# Altium PCB PCB3.PcbDoc (part 1 of 2)
Units mil, origin at the board's own origin, x right, y up, seen from the top; angles counter-clockwise.
Board outline 2200 x 2730 mil, 2 copper layers (Top Layer, Bottom Layer); 68 components, 62 nets, 257 pads, 89 vias.
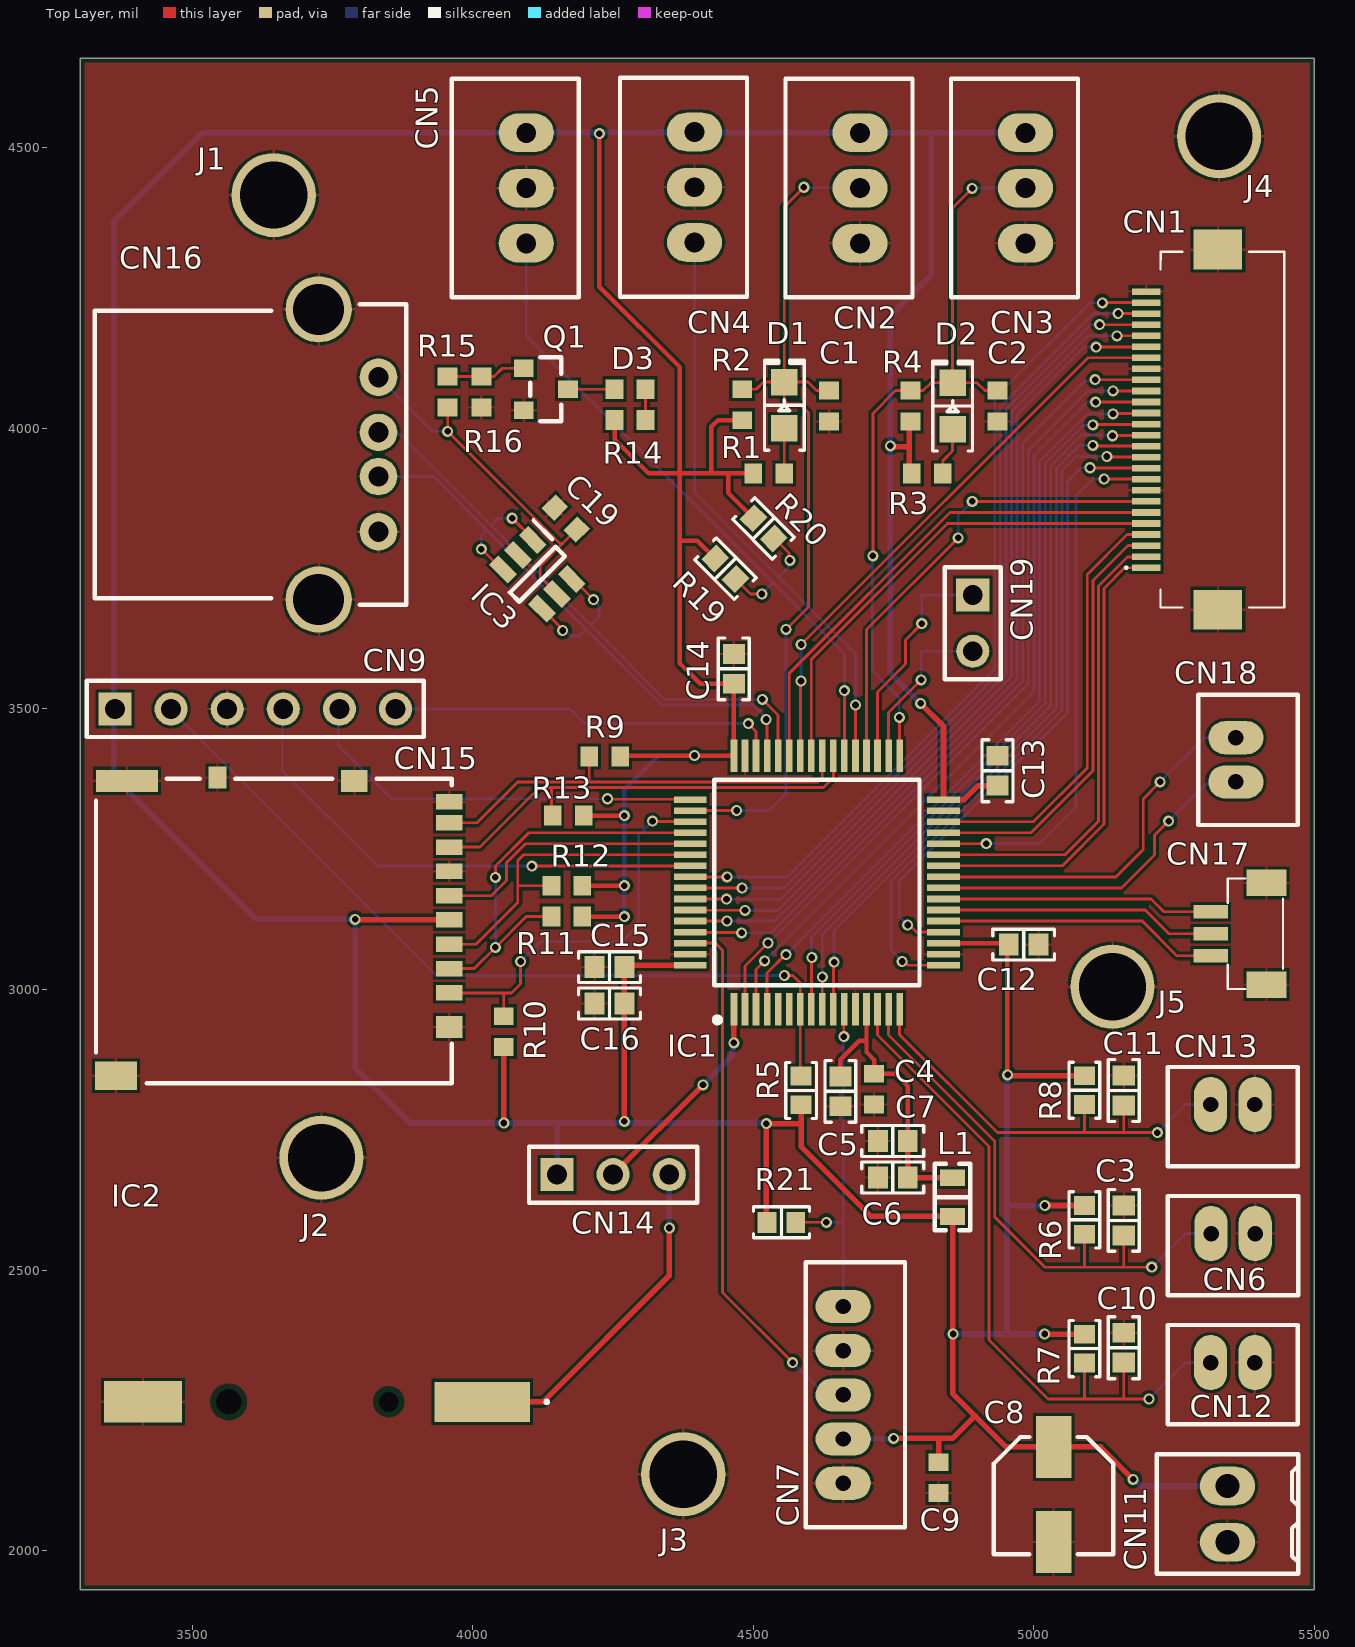
[diagram p0: Top Layer view]
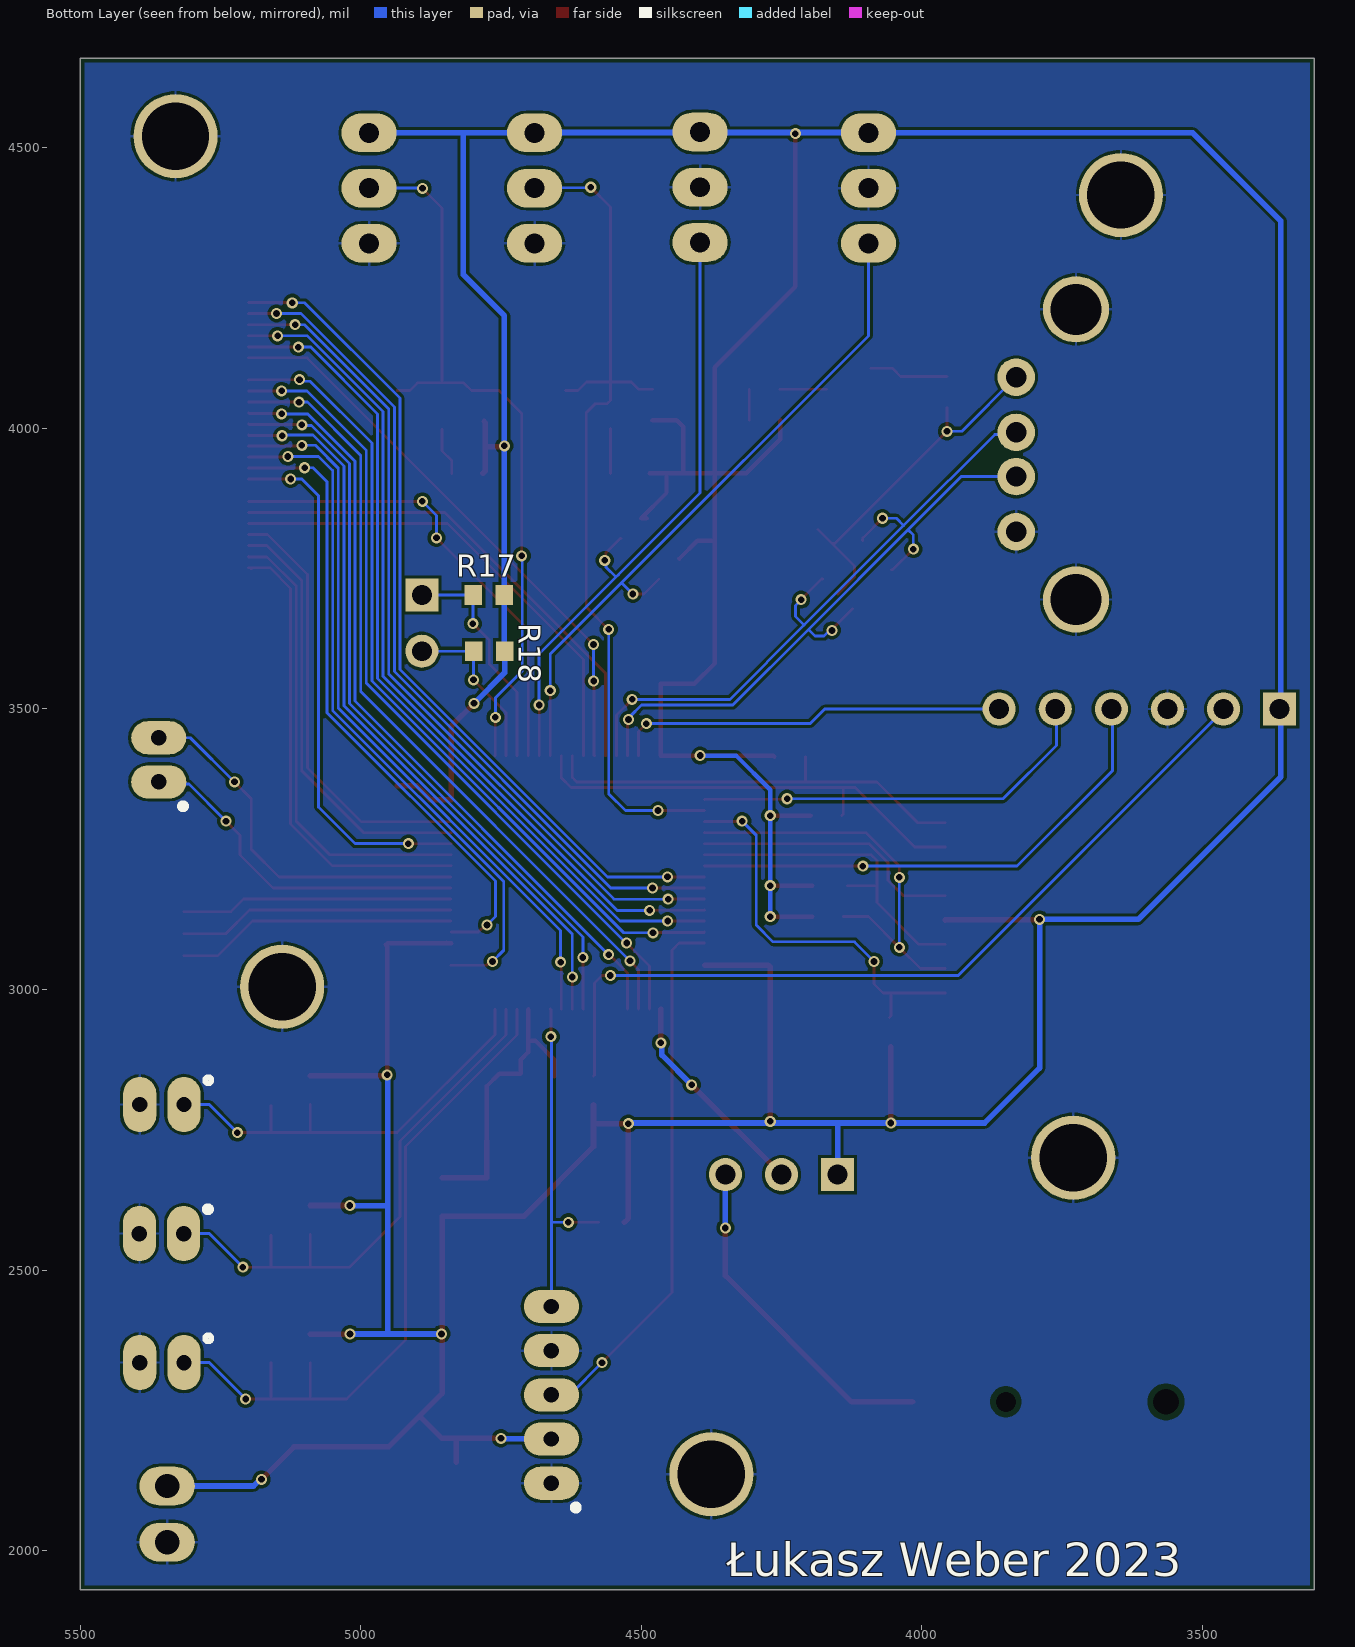
[diagram p1: Bottom Layer view, seen from below]
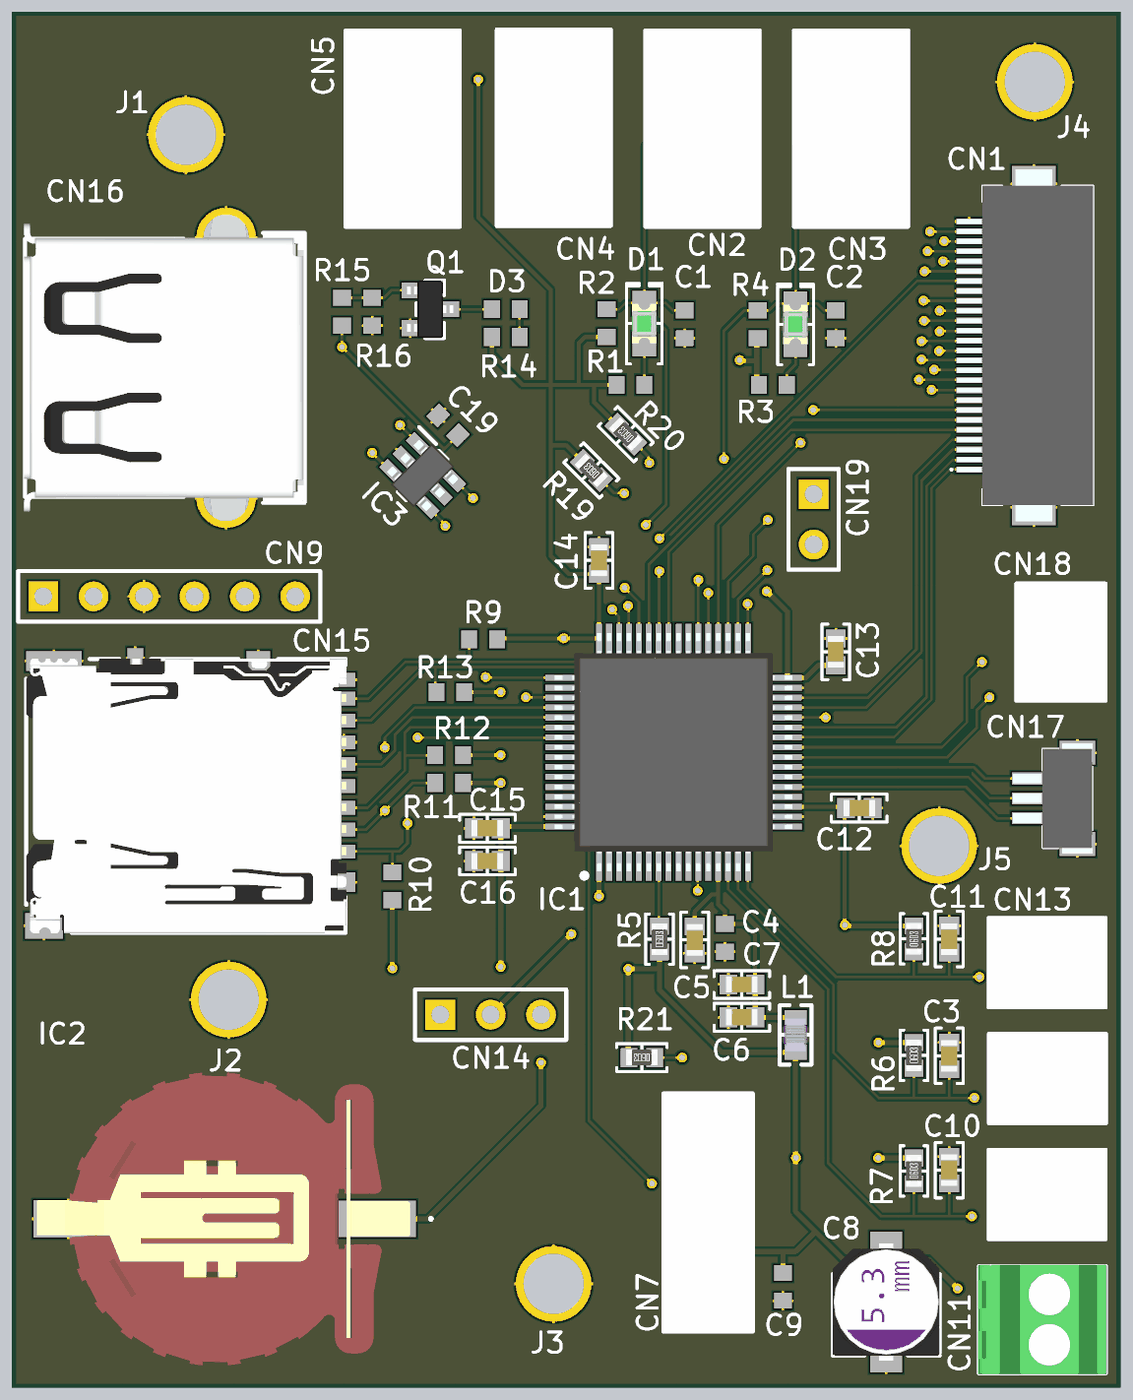
[diagram p2: 3D render of the assembled board from above, using the file's embedded part models]

## Layer stack, top to bottom
Top Solder: solder mask 0.4, Solder Resist, Dk 3.5
Top Layer: signal copper 1.4
Dielectric 1: dielectric 12.6, FR-4, Dk 4.8
Bottom Layer: signal copper 1.4
Bottom Solder: solder mask 0.4, Solder Resist, Dk 3.5

## Board outline
3300,1930 3300,4660 5500,4660 5500,1930

## Design rules (kind name [scope] priority, off if disabled: settings)
BoardOutlineClearance [All] p1: gap=7.87 ignorepadtopadclearanceinfootprint=FALSE
Clearance [All] p1: gap=5 ignorepadtopadclearanceinfootprint=FALSE except(9.84: Arc-Hole Track-Hole SMDPad-Hole THPad-Hole Via-Hole Fill-Hole Poly-Hole Region-Hole Text-Hole)
ComponentClearance [All] p1: gap=5 collisioncheckmode=3 verticalgap=5 showdistances=TRUE
DiffPairsRouting [All] p1: maxlimit=10 minlimit=5 mostfreqgap=5 toplayer_minwidth=5 toplayer_maxwidth=1000 toplayer_prefwidth=5 bottomlayer_minwidth=5 bottomlayer_maxwidth=1000 bottomlayer_prefwidth=5 maxuncoupledlength=500
Height [All] p1: minheight=0 maxheight=71497.94 prefheight=500
HoleSize [All] p1: absolutevalues=TRUE maxlimit=248.03 minlimit=5.91 maxpercent=80.000 minpercent=20.000
HoleToHoleClearance [All] p1: gap=19.68 allowstackedmicrovias=FALSE
MinimumAnnularRing [All] p1: minimumring=3
MinimumSolderMaskSliver [All] p1: minsoldermaskwidth=0
PlaneClearance [All] p1: clearance=5
PlaneConnect PlaneConnectPowerPads [InPadClass('PowerPads')] p1: planeconnectstyle=Direct reliefexpansion=20 reliefentries=4 reliefconductorwidth=10 reliefairgap=10
PlaneConnect [All] p2: pad.planeconnectstyle=Relief pad.reliefexpansion=11.81 pad.reliefentries=4 pad.reliefconductorwidth=5 pad.reliefairgap=5 via.planeconnectstyle=Direct via.reliefexpansion=11.81 via.reliefentries=4 via.reliefconductorwidth=5 via.reliefairgap=5
PolygonConnect PolygonConnectPowerPads [All vs (InPadClass('PowerPads'))] p1: connectstyle=Direct reliefconductorwidth=10 reliefentries=4 polygonreliefangle="90 Angle" airgapwidth=10
PolygonConnect [All] p2: thpad.connectstyle=Relief thpad.reliefconductorwidth=5 thpad.reliefentries=4 thpad.polygonreliefangle="90 Angle" thpad.airgapwidth=5 smdpad.connectstyle=Relief smdpad.reliefconductorwidth=5 smdpad.reliefentries=4 smdpad.polygonreliefangle="90 Angle" smdpad.airgapwidth=5 via.connectstyle=Direct via.reliefconductorwidth=5 via.reliefentries=4 via.polygonreliefangle="90 Angle" via.airgapwidth=5
RoutingVias [All] p1: holewidth=11.81 width=19.68 viastyle="Through Hole" minholewidth=11.81 minwidth=19.68 maxholewidth=11.81 maxwidth=19.68
SilkToSilkClearance [All] p1: silktosilkclearance=0
SilkToSolderMaskClearance [IsPad] p1: minsilkscreentomaskgap=5 clearancetoexposedcopper=TRUE
SolderMaskExpansion [All] p1: expansion=2.95 istentingtop=FALSE
Width [All] p1: maxlimit=1000 minlimit=5 preferedwidth=5 minimp=50.000000 maximp=50.000000 favimp=50.000000
20 further rules are at their usual default settings.

## Classes and differential pairs
differential pair USB: +USB_P -USB_N

## Components (designator, comment, footprint, x,y, rotation, side; value= is the part's Value field where it differs from the comment)
C1 "X5R" 1608[0603] 4635,4040 r270 top value=100nF
C2 "X5R" 1608[0603] 4935,4040 r270 top value=100nF
C3 "10uF" "CAP 0603_1608" 5160,2588.43 r270 top value=1µF
C4 "X7R" 1608[0603] 4715,2822.44 r90 top value=10nF
C5 "0.1 µF" "CAP 0603_1608" 4655,2818.43 r90 top
C6 "1µF" "CAP 0603_1608" 4748.43,2665 r0 top
C7 "1µF" "CAP 0603_1608" 4748.43,2730 r0 top
C8 "100µF" "CAP ALSMD POLY 5.3MM H6.0MM" 5035,2100 r270 top
C9 "X5R" 1608[0603] 4830,2130 r270 top value=100nF
C10 "10uF" "CAP 0603_1608" 5160,2361.57 r270 top value=1µF
C11 "4.7uF" "CAP 0603_1608" 5160,2820 r270 top value=1µF
C12 "0.1 µF" "CAP 0603_1608" 4981.57,3080 r180 top
C13 "0.1 µF" "CAP 0603_1608" 4935,3390 r270 top
C14 "0.1 µF" "CAP 0603_1608" 4465,3571.57 r270 top
C15 "0.1 µF" "CAP 0603_1608" 4243.43,3040 r0 top
C16 "4.7 µF" "CAP 0603_1608" 4243.43,2975 r0 top
C19 "Cap" 1608[0603] 4165.51,3839.49 r315 top value=100nF
CN1 "FH12-26S-0.5SH_55_" FH1226S05SH55 5304.33,3997.95 r90 top
CN2 "B3B-XH-A(LF)(SN)" "JST XH B3B-XH-A" 4690,4428.43 r270 top
CN3 "B3B-XH-A(LF)(SN)" "JST XH B3B-XH-A" 4985,4428.43 r270 top
CN4 "B3B-XH-A(LF)(SN)" "JST XH B3B-XH-A" 4395,4430 r270 top
CN5 "B3B-XH-A(LF)(SN)" "JST XH B3B-XH-A" 4095,4428.43 r270 top
CN6 "B2B-PH-K-S(LF)(SN)" "JST B2B-PH-K" 5355,2565 r0 top
CN7 "B5B-PH-K-S(LF)(SN)" "JST B5B-PH-K" 4660,2277.52 r90 top
CN9 "Header 6" HDR1X6 3362,3500 r0 top
CN11 "282834-2" "TE 282834-2" 5345,2065 r270 top
CN12 "B2B-PH-K-S(LF)(SN)" "JST B2B-PH-K" 5354.37,2335 r0 top
CN13 "B2B-PH-K-S(LF)(SN)" "JST B2B-PH-K" 5354.37,2795 r0 top
CN14 "Header 3" HDR1X3 4150,2670 r0 top
CN15 "DM3AT-SF-PEJM5" "HIROSE DM3AT-SF-PEJM5" 3650,3120 r270 top
CN16 "USB-A1HSW6" "ON SHORE TECHNOLOGY USB-A1HSW6" 3601.38,3953.66 r270 top
CN17 "BM03B-SRSS-TBT_LF__SN_" BM03BSRSSTBTLFSN 5345.51,3099.37 r90 top
CN18 "B2B-PH-K-S(LF)(SN)" "JST B2B-PH-K" 5360,3409.37 r90 top
CN19 "Header 2" HDR1X2 4891,3703 r270 top
D1 "Green" "LED 0805_2012 GREEN" 4555,4041.34 r90 top
D2 "Green" "LED 0805_2012 GREEN" 4855,4040 r90 top
D3 "Green" 1608[0603] 4280,4070 r180 top
IC1 "STM32L562RET6" QFP50P1200X1200X160-64N 4612.95,3190.91 r90 top locked
IC2 "CR1220-H-SMD" CR1220HSMD 3712.2,2265 r180 top
IC3 "USBLC6-2SC6" SOT95P280X145-6N 4115,3740 r315 top
J1 "PTH 3.2mm" "PTH 3.2mm" 3645,4415 r0 top
J2 "PTH 3.2mm" "PTH 3.2mm" 3730,2699 r0 top
J3 "PTH 3.2mm" "PTH 3.2mm" 4375,2135 r0 top
J4 "PTH 3.2mm" "PTH 3.2mm" 5330,4520 r0 top
J5 "PTH 3.2mm" "PTH 3.2mm" 5140,3004 r0 top
L1 "FCM1608KF-601T03" "IND 0603_1608 RF WW" 4855,2630 r270 top value=27nH
Q1 "MMBT3904-TP" "MCCSEMI SOT-23-3" 4130,4070 r0 top
R1 "Res1" 1608[0603] 4527.44,3920 r0 top value=220R
R2 "Res1" 1608[0603] 4480,4042.44 r90 top value=10k
R3 "Res1" 1608[0603] 4810,3920 r0 top value=220R
R4 "Res1" 1608[0603] 4780,4040 r90 top value=10k
R5 "10k" "RES 0603_1608" 4585,2820 r90 top
R6 "4.7 kOhms" "RES 0603_1608" 5090,2589.41 r90 top
R7 "4.7 kOhms" "RES 0603_1608" 5090,2360 r90 top
R8 "2.2 kOhms" "RES 0603_1608" 5090,2820.59 r90 top
R9 "Res1" 1608[0603] 4235,3415 r180 top value=47k
R10 "Res1" 1608[0603] 4055,2925 r270 top value=47k
R11 "Res1" 1608[0603] 4167.56,3130 r0 top value=47k
R12 "Res1" 1608[0603] 4167.56,3185 r180 top value=47k
R13 "Res1" 1608[0603] 4170,3310 r0 top value=47k
R14 "Res1" 1608[0603] 4280,4015 r180 top value=330
R15 "Res1" 1608[0603] 3955,4065 r270 top value=47k
R16 "Res1" 1608[0603] 4015,4065 r90 top value=22k
R17 "Res1" 1608[0603] 4771.56,3703 r0 bottom value=4k7
R18 "Res1" 1608[0603] 4771,3603 r0 bottom value=4k7
R19 "10k" "RES 0603_1608" 4450,3750 r135 top
R20 "10k" "RES 0603_1608" 4518.1,3821.9 r135 top
R21 "4.7 kOhms" "RES 0603_1608" 4550,2585 r180 top

## Footprints (in the part's own frame and the unit in brackets; to place one, negate y for a bottom-side part, rotate by r counter-clockwise, add the part's x,y. Pads: shape width x height; smd on the part's side, far side on the other; paste and mask are expansions set on the pad)
1608[0603] [mm] "Chip Capacitor, Body 1.6x0.8mm, IPC High Density"
  rect 0.8x0.9 smd: 1(-0.7,0) 2(0.7,0)
  body extent -0.87,-0.48 0.87,0.48, height 1.3
BM03BSRSSTBTLFSN [mm]
  rect 0.6x1.55 smd: 1(-1,0.775) 2(0,0.775) 3(1,0.775)
  rect 1.2x1.8 smd: MP1(-2.3,-1.75) MP2(2.3,-1.75)
  silkscreen extent -2.5,-2.5 2.5,0, body extent -2.78,-2.53 2.78,1.49, height 4.35
"CAP 0603_1608" [mm] "Chip Capacitor, 2-Leads, Body 1.60x0.80mm, IPC Medium Density"
  rect 0.9x1 smd: 1(-0.675,0) 2(0.675,0)
  silkscreen extent -1.4,-0.7 1.4,0.7, body extent -0.8,-0.41 0.8,0.41, height 0.82
"CAP ALSMD POLY 5.3MM H6.0MM" [mm] "Aluminum Polymer Capacitor, Body 5.30x5.30x6.0mm, IPC Medium Density"
  rect 2.8x1.6 smd: 1(-2.15,0) 2(2.15,0)
  silkscreen extent -2.6,-2.7 2.7,2.7, body extent -2.95,-2.7 2.95,2.7, height 6
CR1220HSMD [mm]
  rect 4.32x1.82 smd: 1(-7.73,0)
  rect 3.52x1.87 smd: 2(7.63,0)
  round 0.45 hole 0.9 unplated: MH1(-3.5,0)
  round 0.58 hole 1.16 unplated: MH2(3.75,0)
  silkscreen extent -10.7,-0.05 -10.6,0.05, body extent -9.6,-7.37 9.2,7.38, height 4.21
FH1226S05SH55 [mm]
  rect 0.3x1.3 smd: 1(-6.25,2.65) 2(-5.75,2.65) 3(-5.25,2.65) 4(-4.75,2.65) 5(-4.25,2.65) 6(-3.75,2.65) 7(-3.25,2.65) 8(-2.75,2.65) 9(-2.25,2.65) 10(-1.75,2.65) 11(-1.25,2.65) 12(-0.75,2.65) 13(-0.25,2.65) 14(0.25,2.65) 15(0.75,2.65) 16(1.25,2.65) 17(1.75,2.65) 18(2.25,2.65) 19(2.75,2.65) 20(3.25,2.65) 21(3.75,2.65) 22(4.25,2.65) 23(4.75,2.65) 24(5.25,2.65) 25(5.75,2.65) 26(6.25,2.65)
  rect 1.8x2.2 smd: MP1(-8.15,-0.6) MP2(8.15,-0.6)
  silkscreen extent -8.05,-3.6 8.05,3.6, body extent -8.87,-3.6 8.87,3.27, height 2.3
HDR1X2 [mm] "Connector; Header; 2 Position"
  rect 1.5x1.5 hole 0.9: 1(0,0)
  round 1.5 hole 0.9: 2(2.54,0)
  silkscreen extent -1.27,-1.27 3.81,1.27
HDR1X3 [mm] "Connector; Header; 3 Position"
  rect 1.5x1.5 hole 0.9: 1(0,0)
  round 1.5 hole 0.9: 2(2.54,0) 3(5.08,0)
  silkscreen extent -1.27,-1.27 6.35,1.27
HDR1X6 [mm] "Connector; Header; 6 Position"
  rect 1.5x1.5 hole 0.9: 1(0,0)
  round 1.5 hole 0.9: 2(2.54,0) 3(5.08,0) 4(7.62,0) 5(10.16,0) 6(12.7,0)
  silkscreen extent -1.27,-1.27 13.97,1.27
"HIROSE DM3AT-SF-PEJM5" [mm]
  rect 0.7x1.2 smd: 1(3.2,7.825) 2(2.1,7.825) 3(1,7.825) 4(-0.1,7.825) 5(-1.2,7.825) 6(-2.3,7.825) 7(-3.4,7.825) 8(-4.5,7.825) 9(-5.45,7.825)
  rect 1x0.8 smd: 10(-6.55,-2.675)
  rect 1x1.2 smd: S(-6.4,3.525) S(4.75,7.825)
  rect 1x2.8 smd: S(-6.4,-6.775)
  rect 1.3x1.9 smd: S(6.95,-7.275)
  silkscreen extent -6.5,-8.18 7.3,7.93, body extent -6.52,-8.18 7.32,7.97, height 1.68
"IND 0603_1608 RF WW" [mm] "Chip Inductor, 2-Leads, Body 1.65x0.99mm, IPC Medium Density"
  rect 0.76x1.13 smd: 1(-0.875,0) 2(0.875,0)
  silkscreen extent -1.5,-0.8 1.5,0.8, body extent -0.84,-0.58 0.83,0.58, height 1
"JST B2B-PH-K" [mm]
  oval 1.5x2.5 hole 0.7: 1(-1,0) 2(1,0)
  silkscreen extent -2.95,-2.8 2.95,1.7, body extent -2.95,-2.8 2.95,1.7, height 6
"JST B5B-PH-K" [mm]
  oval 1.5x2.5 hole 0.7: 1(-4,0) 2(-2,0) 3(0,0) 4(2,0) 5(4,0)
  silkscreen extent -6,-2.8 6,1.7, body extent -5.95,-2.8 5.95,1.7, height 6
"JST XH B3B-XH-A" [mm]
  oval 1.75x2.5 hole 0.9: 1(-2.5,0) 2(0,0) 3(2.5,0)
  silkscreen extent -4.95,-3.38 4.95,2.38, body extent -4.95,-3.38 4.95,2.38, height 7
"LED 0805_2012 GREEN" [mm] "Chip Diode, 2-Leads, Body 2.00x1.25mm, IPC Medium Density"
  rect 1.2x1.2 smd: 1(-1.05,0) 2(1.05,0)
  silkscreen extent -2.03,-0.9 2.03,0.9, body extent -1,-0.62 1,0.63, height 0.9
"MCCSEMI SOT-23-3" [mm] "SOT23, 3-Leads, Body 2.92x2.37mm, Pitch 0.95mm, IPC Medium Density"
  rect 0.9x0.8 smd: 1(-1,0.95) 2(-1,-0.95) 3(1,0)
  silkscreen extent -0.7,-1.45 0.7,1.45, body extent -1.16,-1.45 1.16,1.45, height 1.5
"ON SHORE TECHNOLOGY USB-A1HSW6" [mm] "USB2.0 TYPEA 4 Pin Pitch 2-2.5mm"
  round 1.7 hole 0.92: 1(-3.5,5.85) 2(-1,5.85) 3(1,5.85) 4(3.5,5.85)
  round 3 hole 2.3: S(-6.57,3.14) S(6.57,3.14)
  silkscreen extent -6.8,-7 6.8,7.1, body extent -7.9,-7.05 7.9,7.05, height 7.6
"PTH 3.2mm" [mil]
  round 150 hole 120: 1(0,1)
QFP50P1200X1200X160-64N [mm]
  rect 1.475x0.3 smd: 1(-5.738,3.75) 2(-5.738,3.25) 3(-5.738,2.75) 4(-5.738,2.25) 5(-5.738,1.75) 6(-5.738,1.25) 7(-5.738,0.75) 8(-5.738,0.25) 9(-5.738,-0.25) 10(-5.738,-0.75) 11(-5.738,-1.25) 12(-5.738,-1.75) 13(-5.738,-2.25) 14(-5.738,-2.75) 15(-5.738,-3.25) 16(-5.738,-3.75) 33(5.738,-3.75) 34(5.738,-3.25) 35(5.738,-2.75) 36(5.738,-2.25) 37(5.738,-1.75) 38(5.738,-1.25) 39(5.738,-0.75) 40(5.738,-0.25) 41(5.738,0.25) 42(5.738,0.75) 43(5.738,1.25) 44(5.738,1.75) 45(5.738,2.25) 46(5.738,2.75) 47(5.738,3.25) 48(5.738,3.75)
  rect 0.3x1.475 smd: 17(-3.75,-5.738) 18(-3.25,-5.738) 19(-2.75,-5.738) 20(-2.25,-5.738) 21(-1.75,-5.738) 22(-1.25,-5.738) 23(-0.75,-5.738) 24(-0.25,-5.738) 25(0.25,-5.738) 26(0.75,-5.738) 27(1.25,-5.738) 28(1.75,-5.738) 29(2.25,-5.738) 30(2.75,-5.738) 31(3.25,-5.738) 32(3.75,-5.738) 49(3.75,5.738) 50(3.25,5.738) 51(2.75,5.738) 52(2.25,5.738) 53(1.75,5.738) 54(1.25,5.738) 55(0.75,5.738) 56(0.25,5.738) 57(-0.25,5.738) 58(-0.75,5.738) 59(-1.25,5.738) 60(-1.75,5.738) 61(-2.25,5.738) 62(-2.75,5.738) 63(-3.25,5.738) 64(-3.75,5.738)
  silkscreen extent -6.35,-4.65 4.65,4.65, body extent -6,-6 6,6, height 1.6
"RES 0603_1608" [mm] "Chip Resistor, 2-Leads, Body 1.60x0.80mm, IPC Medium Density"
  rect 0.85x0.95 smd: 1(-0.65,0) 2(0.65,0)
  silkscreen extent -1.27,-0.7 1.27,0.7, body extent -0.8,-0.4 0.8,0.4, height 0.45
SOT95P280X145-6N [mm]
  rect 1.2x0.6 smd: 1(-1.25,0.95) 2(-1.25,0) 3(-1.25,-0.95) 4(1.25,-0.95) 5(1.25,0) 6(1.25,0.95)
  silkscreen extent -1.85,-1.46 0.3,1.6, body extent -1.4,-1.46 1.4,1.46, height 1.45
"TE 282834-2" [mm]
  oval 1.75x2.5 hole 1.1: 1(-1.27,0) 2(1.27,0)
  silkscreen extent -2.7,-3.2 2.7,3.2, body extent -2.77,-3.25 2.77,3.25, height 10

## Part data
C1 C2 C4 C9: library part Cap, "Capacitor", LatestRevisionDate=17-Jul-2002, LatestRevisionNote="Re-released for DXP Platform.", PackageDescription="Radial Cap, Thru-Hole; 2 Leads; 0.3 in Pin Spacing", PackageReference=RAD-0.3, Published=8-Jun-2000, Publisher="Altium Limited"
C3 C10 C11: library part 0603YD105KAT4A, "CAP CER 1UF 16V X5R 0603", Capacitance=1µF, Device Package="0603 (1608 Metric)", manufacturer="AVX Corporation", Operating Temperature="-55°C ~ 85°C", Supplier Part Number 1=478-10365-1-ND, Temperature Coefficient=X5R, Tolerance=±10%, Voltage - Rated=16V, Applications="General Purpose", componentlink1description=Datasheet, componentlink1url=http://datasheets.avx.com/cx5r.pdf, componentlink2description="DigiKey Link", componentlink2url=http://digikey.com/product-detail/en/avx-corporation/0603YD105KAT4A/478-10365-1-ND/6797443, lastupdated="9/2/2020 1:03:10 AM", Lifecycle Status=Active, Minimum Order=1, Mounting Type="Surface Mount, MLCC", Package / Case="0603 (1608 Metric)", packaging=TapeAndReel, Part Number=0603YD105KAT4A, Part Status=Active, partid=15257, price=0.03, series=-, Size / Dimension="0.063\" L x 0.032\" W (1.60mm x 0.81mm)", Supplier 1=DigiKey, Thickness (Max)="0.035\" (0.90mm)"
C5 C12 C13 C14 C15: library part 0603B104K101CT, "CAP CER 0.1UF 100V X7R 0603", Device Package="0603 (1608 Metric)", manufacturer="Walsin Technology Corporation", Operating Temperature="-55°C ~ 125°C", Supplier Part Number 1=1292-1392-1-ND, Temperature Coefficient=X7R, Tolerance=±10%, Voltage - Rated=100V, Applications="General Purpose", Capacitance="0.1 µF", componentlink1description=Datasheet, componentlink1url=http://www.passivecomponent.com/wp-content/uploads/2018/10/MLCC.pdf, componentlink2description="DigiKey Link", componentlink2url=https://www.digikey.com/en/products/detail/walsin-technology-corporation/0603B104K101CT/9354889, lastupdated="4/8/2023 7:09:18 PM", Lifecycle Status=Active, Minimum Order=1, Mounting Type="Surface Mount, MLCC", Package / Case="0603 (1608 Metric)", packaging=TapeAndReel, Part Number=0603B104K101CT, Part Status=Active, partid=4273, price=0.01, series=-, Size / Dimension="0.063\" L x 0.031\" W (1.60mm x 0.80mm)", Supplier 1=DigiKey, Thickness (Max)="0.037\" (0.95mm)"
C6 C7: library part 0603YD105KAT4A, "CAP CER 1UF 16V X5R 0603", Device Package="0603 (1608 Metric)", manufacturer="AVX Corporation", Operating Temperature="-55°C ~ 85°C", Supplier Part Number 1=478-10365-1-ND, Temperature Coefficient=X5R, Tolerance=±10%, Voltage - Rated=16V, Applications="General Purpose", Capacitance=1µF, componentlink1description=Datasheet, componentlink1url=http://datasheets.avx.com/cx5r.pdf, componentlink2description="DigiKey Link", componentlink2url=http://digikey.com/product-detail/en/avx-corporation/0603YD105KAT4A/478-10365-1-ND/6797443, lastupdated="9/2/2020 1:03:10 AM", Lifecycle Status=Active, Minimum Order=1, Mounting Type="Surface Mount, MLCC", Package / Case="0603 (1608 Metric)", packaging=TapeAndReel, Part Number=0603YD105KAT4A, Part Status=Active, partid=15257, price=0.03, series=-, Size / Dimension="0.063\" L x 0.032\" W (1.60mm x 0.81mm)", Supplier 1=DigiKey, Thickness (Max)="0.035\" (0.90mm)"
C8: library part 6SVPC100M, "CAP ALUM POLY 100UF 20% 6.3V SMD", Device Package="Radial, Can - SMD", ESR (Equivalent Series Resistance)=30mOhm, Lifetime @ Temp.="2000 Hrs @ 105°C", manufacturer="Panasonic Electronic Components", Operating Temperature="-55°C ~ 105°C", Ripple Current @ High Frequency="2.15A @ 100kHz", Ripple Current @ Low Frequency="107.5mA @ 120Hz", Supplier Part Number 1=P16606CT-ND, Tolerance=±20%, Voltage - Rated=6.3V, Applications="General Purpose", Capacitance=100µF, componentlink1description=Datasheet, componentlink1url=https://industrial.panasonic.com/cdbs/www-data/pdf/AAB8000/AAB8000C256.pdf, componentlink2description="DigiKey Link", componentlink2url=http://digikey.com/product-detail/en/panasonic-electronic-components/6SVPC100M/P16606CT-ND/4204442, Height - Seated (Max)="0.236\" (6.00mm)", lastupdated="9/2/2020 1:22:07 AM", Lifecycle Status=Active, Minimum Order=1, Mounting Type="Surface Mount", Package / Case="Radial, Can - SMD", packaging=TapeAndReel, Part Number=6SVPC100M, Part Status=Active, partid=1943, price=0.51, series="OS-CON™, SVPC", Size / Dimension="0.197\" Dia (5.00mm)", Supplier 1=DigiKey, Surface Mount Land Size="0.209\" L x 0.209\" W (5.30mm x 5.30mm)", Type=Polymer
C16: library part GRM185R61C475KE11D, "CAP CER 4.7UF 16V X5R 0603", Device Package="0603 (1608 Metric)", manufacturer="Murata Electronics", Operating Temperature="-55°C ~ 85°C", Supplier Part Number 1=490-14459-1-ND, Temperature Coefficient=X5R, Tolerance=±10%, Voltage - Rated=16V, Applications="General Purpose", Capacitance="4.7 µF", componentlink1description=Datasheet, componentlink1url=https://search.murata.co.jp/Ceramy/image/img/A01X/G101/ENG/GRM185R61C475KE11-01.pdf, componentlink2description="DigiKey Link", componentlink2url=https://www.digikey.com/en/products/detail/murata-electronics/GRM185R61C475KE11D/6606088, lastupdated="3/28/2023 7:09:04 PM", Lifecycle Status=Active, Minimum Order=1, Mounting Type="Surface Mount, MLCC", Package / Case="0603 (1608 Metric)", packaging=TapeAndReel, Part Number=GRM185R61C475KE11D, Part Status=Active, partid=2451, price=0.05, series=GRM, Size / Dimension="0.063\" L x 0.031\" W (1.60mm x 0.80mm)", Supplier 1=DigiKey, Thickness (Max)="0.022\" (0.55mm)"
C19: "Capacitor", LatestRevisionDate=17-Jul-2002, LatestRevisionNote="Re-released for DXP Platform.", PackageDescription="Radial Cap, Thru-Hole; 2 Leads; 0.3 in Pin Spacing", PackageReference=RAD-0.3, Published=8-Jun-2000, Publisher="Altium Limited"
CN1: "Connector", Arrow Part Number=FH12-26S-0.5SH(55), Manufacturer_Name=Hirose, Mouser Part Number=798-FH12-26S-0.5SH55, Arrow Price/Stock=https://www.arrow.com/en/products/fh12-26s-0.5sh-55/hirose-electric, Datasheet Link=https://datasheet.datasheetarchive.com/originals/distributors/SFDatasheet-1/sf-00023459.pdf, Height=2.2mm, Manufacturer_Part_Number=FH12-26S-0.5SH(55), Mouser Price/Stock=https://www.mouser.co.uk/ProductDetail/Hirose-Connector/FH12-26S-0.5SH55?qs=Ux3WWAnHpjC%2FipJJsmJDaQ%3D%3D
CN2 CN3 CN4 CN5: "CONN HEADER VERT 3POS 2.5MM", Current Rating (Amps)=3A, Insulation Color=Natural, manufacturer="JST Sales America Inc.", Material Flammability Rating="UL94 V-0", Operating Temperature="-25°C ~ 85°C", Supplier Part Number 1=455-2248-ND, Voltage Rating=250V, componentlink1description=Datasheet, componentlink1url=http://www.jst-mfg.com/product/pdf/eng/eXH.pdf, componentlink2description="DigiKey Link", componentlink2url=http://digikey.com/product-detail/en/jst-sales-america-inc/B3B-XH-A-LF-SN/455-2248-ND/1651046, Connector Type=Header, Contact Finish - Mating=Tin, Contact Finish - Post=Tin, Contact Length - Post="0.134\" (3.40mm)", Contact Material=Brass, Contact Shape=Square, Contact Type="Male Pin", Fastening Type="Detent Lock", Insulation Height="0.276\" (7.00mm)", Insulation Material="Polyamide (PA66), Nylon 6/6", lastupdated="1/12/2020 11:46:22 PM", Lifecycle Status=Active, Minimum Order=1, Mounting Type="Through Hole", Number of Positions=3, Number of Positions Loaded=All, Number of Rows=1, packaging=Bulk, Part Number=B3B-XH-A(LF)(SN), Part Status=Active, partid=68, Pitch - Mating="0.098\" (2.50mm)", price=0.19, series=XH, Shrouding="Shrouded - 4 Wall", Style="Board to Cable/Wire", Supplier 1=DigiKey, Termination="Press-Fit, Solder"
CN6 CN12 CN13 CN18: "CONN HEADER VERT 2POS 2MM", Current Rating (Amps)=2A, Insulation Color=Natural, manufacturer="JST Sales America Inc.", Material Flammability Rating="UL94 V-0", Operating Temperature="-25°C ~ 85°C", Supplier Part Number 1=455-1704-ND, Voltage Rating=100V, componentlink1description=Datasheet, componentlink1url=http://www.jst-mfg.com/product/pdf/eng/ePH.pdf, componentlink2description="DigiKey Link", componentlink2url=http://digikey.com/product-detail/en/jst-sales-america-inc/B2B-PH-K-S-LF-SN/455-1704-ND/926611, Connector Type=Header, Contact Finish - Mating=Tin, Contact Finish - Post=Tin, Contact Length - Mating="0.130\" (3.30mm)", Contact Length - Post="0.134\" (3.40mm)", Contact Material=Brass, Contact Shape=Square, Contact Type="Male Pin", Fastening Type="Detent Lock", Insulation Height="0.236\" (6.00mm)", Insulation Material="Polyamide (PA66), Nylon 6/6", lastupdated="1/3/2020 11:40:58 PM", Lifecycle Status=Active, Minimum Order=1, Mounting Type="Through Hole", Number of Positions=2, Number of Positions Loaded=All, Number of Rows=1, Overall Contact Length="0.333\" (8.45mm)", packaging=Bulk, Part Number=B2B-PH-K-S(LF)(SN), Part Status=Active, partid=11, Pitch - Mating="0.079\" (2.00mm)", price=0.17, series=PH, Shrouding="Shrouded - 4 Wall", Style="Board to Cable/Wire", Supplier 1=DigiKey, Termination="Press-Fit, Solder"
CN7: "CONN HEADER VERT 5POS 2MM", Current Rating (Amps)=2A, Insulation Color=Natural, manufacturer="JST Sales America Inc.", Material Flammability Rating="UL94 V-0", Operating Temperature="-25°C ~ 85°C", Supplier Part Number 1=455-1707-ND, Voltage Rating=100V, componentlink1description=Datasheet, componentlink1url=http://www.jst-mfg.com/product/pdf/eng/ePH.pdf, componentlink2description="DigiKey Link", componentlink2url=http://digikey.com/product-detail/en/jst-sales-america-inc/B5B-PH-K-S-LF-SN/455-1707-ND/926614, Connector Type=Header, Contact Finish - Mating=Tin, Contact Finish - Post=Tin, Contact Length - Mating="0.130\" (3.30mm)", Contact Length - Post="0.134\" (3.40mm)", Contact Material=Brass, Contact Shape=Square, Contact Type="Male Pin", Fastening Type="Detent Lock", Insulation Height="0.236\" (6.00mm)", Insulation Material="Polyamide (PA66), Nylon 6/6", lastupdated="1/12/2020 10:30:05 PM", Lifecycle Status=Active, Minimum Order=1, Mounting Type="Through Hole", Number of Positions=5, Number of Positions Loaded=All, Number of Rows=1, Overall Contact Length="0.333\" (8.45mm)", packaging=Bulk, Part Number=B5B-PH-K-S(LF)(SN), Part Status=Active, partid=28, Pitch - Mating="0.079\" (2.00mm)", price=0.29, series=PH, Shrouding="Shrouded - 4 Wall", Style="Board to Cable/Wire", Supplier 1=DigiKey, Termination="Press-Fit, Solder"
CN9: "Header, 6-Pin", LatestRevisionDate=17-Jul-2002, LatestRevisionNote="Re-released for DXP Platform.", Publisher="Altium Limited"
CN11: "TERM BLK 2P SIDE ENT 2.54MM PCB", Color=Green, Current=10A, manufacturer="TE Connectivity AMP Connectors", Supplier Part Number 1=A98333-ND, Voltage=150V, componentlink1description=Datasheet, componentlink1url=https://www.te.com/commerce/DocumentDelivery/DDEController?Action=srchrtrv&DocNm=282834&DocType=Customer+Drawing&DocLang=English, componentlink2description="DigiKey Link", componentlink2url=http://digikey.com/product-detail/en/te-connectivity-amp-connectors/282834-2/A98333-ND/1150135, lastupdated="1/15/2020 4:15:38 AM", Lifecycle Status=Active, Mating Orientation="Horizontal with Board", Minimum Order=1, Mounting Type="Through Hole", Number of Levels=1, packaging=Bulk, Part Number=282834-2, Part Status=Active, Pitch="0.100\" (2.54mm)", Positions Per Level=2, price=0.88, series=Buchanan, Supplier 1=DigiKey, Wire Gauge="16-30 AWG", Wire Termination="Screw - Rising Cage Clamp"
CN14: "Header, 3-Pin", LatestRevisionDate=17-Jul-2002, LatestRevisionNote="Re-released for DXP Platform.", Publisher="Altium Limited"
CN15: "CONN MICRO SD CARD PUSH-PUSH R/A", manufacturer="Hirose Electric Co Ltd", Supplier Part Number 1=HR1964TR-ND, Card Type="Secure Digital - microSD™", componentlink1description=Datasheet, componentlink1url=https://www.hirose.com/product/document?clcode=CL0609-0033-6-00&productname=DM3AT-SF-PEJ2M5&series=DM3&documenttype=Catalog&lang=en&documentid=D49662_en, componentlink2description="DigiKey Link", componentlink2url=//digikey.com/product-detail/en/hirose-electric-co-ltd/DM3AT-SF-PEJM5/HR1964TR-ND/2533565, Connector Type="Connector and Ejector", Contact Finish=Gold, Features=Switch, Height Above Board="0.066\" (1.68mm)", Insertion, Removal Method="Push In, Push Out", lastupdated="12/16/2019 8:34:40 PM", Lifecycle Status=0, Minimum Order=1, Mounting Feature="Normal, Standard - Top", Mounting Type="Surface Mount, Right Angle", Number of Positions="10 (8 + 2)", packaging=TapeAndReel, Part Number=DM3AT-SF-PEJM5, Part Status=Active, price=1.41, series=DM3, Supplier 1=DigiKey
CN16: "CONN RCPT TYPEA 4POS R/A", Current Rating (Amps)=1A, manufacturer="On Shore Technology Inc.", Operating Temperature="0°C ~ 85°C", Supplier Part Number 1=ED2989-ND, Voltage - Rated=30VAC, componentlink1description=Datasheet, componentlink1url=http://www.on-shore.com/wp-content/uploads/USB-A1HSXX.pdf, componentlink2description="DigiKey Link", componentlink2url=http://digikey.com/product-detail/en/on-shore-technology-inc/USB-A1HSW6/ED2989-ND/2677750, Connector Type="USB - A", Features="Board Lock", Gender=Receptacle, lastupdated="4/30/2020 11:56:44 AM", Lifecycle Status=Active, Minimum Order=1, Mounting Feature=Horizontal, Mounting Type="Through Hole, Right Angle", Number of Contacts=4, Number of Ports=1, packaging=Tray, Part Number=USB-A1HSW6, Part Status=Active, price=0.48, series=-, Shielding=Unshielded, Supplier 1=DigiKey, Termination=Solder
CN17: "Connector", Arrow Part Number=BM03B-SRSS-TBT(LF)(SN), Manufacturer_Name="JST (JAPAN SOLDERLESS TERMINALS)", Arrow Price/Stock=https://www.arrow.com/en/products/bm03b-srss-tbt-lf-sn/jst-manufacturing, Datasheet Link=http://www.jst-mfg.com/product/pdf/eng/eSR.pdf, Height=4.25mm, Manufacturer_Part_Number=BM03B-SRSS-TBT(LF)(SN)
CN19: "Header, 2-Pin", LatestRevisionDate=17-Jul-2002, LatestRevisionNote="Re-released for DXP Platform.", Publisher="Altium Limited"
D1 D2: library part QTLP630C4TR, "LED GREEN CLEAR 0805 SMD", Current - Test=20mA, Device Package="0805 (2012 Metric)", Lens Color=Colorless, manufacturer="Everlight Electronics Co Ltd", Millicandela Rating=10mcd, Supplier Device Package=0805, Supplier Part Number 1=1080-1411-1-ND, Voltage - Forward (Vf) (Typ)=2.1V, Color=Green, componentlink1description=Datasheet, componentlink1url=//media.digikey.com/PDF/Data%20Sheets/Everlight%20PDFs/QTLP630-2.pdf, componentlink2description="DigiKey Link", componentlink2url=https://www.digikey.com/en/products/detail/everlight-electronics-co-ltd/QTLP630C4TR/2675902, Configuration=Standard, Height (Max)=1.20mm, lastupdated="3/28/2023 7:59:32 PM", Lens Size="1.40mm x 1.25mm", Lens Style="Rectangle with Flat Top", Lens Transparency=Clear, Lifecycle Status=Active, Minimum Order=1, Mounting Type="Surface Mount", Package / Case="0805 (2012 Metric)", packaging=TapeAndReel, Part Number=QTLP630C4TR, Part Status=Active, partid=240, price=0.04, series=-, Size / Dimension="2.00mm L x 1.25mm W", Supplier 1=DigiKey, Viewing Angle=140°, Wavelength - Dominant=570nm, Wavelength - Peak=565nm
D3: library part LED3, "Typical BLUE SiC LED", DatasheetVersion=16-Apr-2002, LatestRevisionDate=17-Dec-2003, LatestRevisionNote="PCB Footprint replaced.", PackageDescription="SM LED; 2 C-Bend Leads; Body 3.5 x 2.8 x 1.9 mm, inc leads (LxWxH typ)", PackageReference=3.5X2.8X1.9, PackageVersion=16-Apr-2002, Published=8-Jun-2000, Publisher="Altium Limited"
IC1: "Integrated Circuit", Manufacturer_Name=STMicroelectronics, Mouser Part Number=511-STM32L562RET6, Arrow Part Number=STM32L562RET6, Arrow Price/Stock=https://www.arrow.com/en/products/stm32l562ret6/stmicroelectronics?region=nac, Datasheet Link=https://www.st.com/resource/en/datasheet/stm32l562ve.pdf, Height=1.6mm, Manufacturer_Part_Number=STM32L562RET6, Mouser Price/Stock=https://www.mouser.co.uk/ProductDetail/STMicroelectronics/STM32L562RET6?qs=%252B6g0mu59x7IOhyLRk%252BE%2Fjw%3D%3D
IC2: "Integrated Circuit", Manufacturer_Name=ROBOTIS, Datasheet Link=https://www.robotics.org.za/CR1220-H-SMD, Height=4.1mm, Manufacturer_Part_Number=CR1220-H-SMD
IC3: "Integrated Circuit", Manufacturer_Name=STMicroelectronics, Mouser Part Number=511-USBLC6-2SC6, Arrow Part Number=USBLC6-2SC6, Arrow Price/Stock=https://www.arrow.com/en/products/usblc6-2sc6/stmicroelectronics?region=nac, Datasheet Link=http://www.st.com/st-web-ui/static/active/en/resource/technical/document/datasheet/CD00050750.pdf, Height=1.45mm, Manufacturer_Part_Number=USBLC6-2SC6, Mouser Price/Stock=https://www.mouser.co.uk/ProductDetail/STMicroelectronics/USBLC6-2SC6?qs=po45yt2pPpu%2FhNIlwQdTlg%3D%3D
L1: library part 744917127, "FIXED IND 27NH 780MA 200 MOHM", Current Rating (Amps)=780mA, DC Resistance (DCR)="200mOhm Max", Device Package="0603 (1608 Metric)", Frequency - Self Resonant=2.8GHz, Inductance=27nH, Inductance Frequency - Test=250MHz, manufacturer="Würth Elektronik", Operating Temperature="-40°C ~ 125°C", Q @ Freq="35 @ 250MHz", Supplier Part Number 1=732-11279-1-ND, Tolerance=±2%, componentlink1description=Datasheet, componentlink1url=https://katalog.we-online.de/pbs/datasheet/744917127.pdf, componentlink2description="DigiKey Link", componentlink2url=http://digikey.com/product-detail/en/w-rth-elektronik/744917127/732-11279-1-ND/6833738, Height - Seated (Max)="0.043\" (1.10mm)", lastupdated="9/6/2020 11:05:16 AM", Lifecycle Status=Active, Material - Core=Ceramic, Minimum Order=0, Mounting Type="Surface Mount", Package / Case="0603 (1608 Metric)", packaging=TapeAndReel, Part Number=744917127, Part Status=Active, partid=832, price=0.46, series="WE-KI HC", Shielding=Unshielded, Size / Dimension="0.067\" L x 0.043\" W (1.70mm x 1.10mm)", Supplier 1=DigiKey, Supplier Device Package="0603 (1608 Metric)", Type=Wirewound
Q1: "TRANS NPN 40V 0.2A SOT23", Current - Collector (Ic) (Max)="200 mA", Current - Collector Cutoff (Max)="50nA (ICBO)", DC Current Gain (hFE) (Min) @ Ic, Vce="100 @ 10mA, 1V", Frequency - Transition=300MHz, manufacturer="Micro Commercial Co", Operating Temperature="-55°C ~ 150°C (TJ)", Package / Case="TO-236-3, SC-59, SOT-23-3", Power - Max="350 mW", Supplier Device Package=SOT-23, Supplier Part Number 1=MMBT3904TPMSCT-ND, Voltage - Collector Emitter Breakdown (Max)="40 V", componentlink1description=Datasheet, componentlink1url=https://www.mccsemi.com/pdf/Products/MMBT3904(SOT-23).pdf, componentlink2description="DigiKey Link", componentlink2url=https://www.digikey.com/en/products/detail/micro-commercial-co/MMBT3904-TP/717280, lastupdated="2/3/2023 9:11:21 PM", Lifecycle Status=Active, Minimum Order=1, Mounting Type="Surface Mount", packaging=TapeAndReel, Part Number=MMBT3904-TP, Part Status=Active, partid=260, price=0.01, series=-, Supplier 1=DigiKey, Transistor Type=NPN, Vce Saturation (Max) @ Ib, Ic="300mV @ 5mA, 50mA"
R1 R2 R3 R4 R9 R10 R11 R12 R13 R14 R15 R16 R17 R18: "Resistor", LatestRevisionDate=17-Jul-2002, LatestRevisionNote="Re-released for DXP Platform.", PackageDescription="Axial Device, Thru-Hole; 2 Leads; 0.3 in Pin Spacing", PackageReference=AXIAL-0.3, Published=8-Jun-2000, Publisher="Altium Limited"
R5 R19 R20: library part RC0603FR-7W10KL, "RES 10K OHM 1% 1/5W 0603", Device Package="0603 (1608 Metric)", manufacturer=Yageo, Operating Temperature="-55°C ~ 155°C", Power (Watts)="0.2W, 1/5W", Resistance="10 kOhms", Supplier Device Package=0603, Supplier Part Number 1=13-RC0603FR-7W10KLCT-ND, Temperature Coefficient=±200ppm/°C, Tolerance=±1%, componentlink1description=Datasheet, componentlink1url=https://www.yageo.com/upload/media/product/productsearch/datasheet/rchip/PYu-RC_Group_51_RoHS_L_11.pdf, componentlink2description="DigiKey Link", componentlink2url=https://www.digikey.com/en/products/detail/yageo/RC0603FR-7W10KL/12698809, Composition="Thick Film", Features="Moisture Resistant", Height - Seated (Max)="0.022\" (0.55mm)", lastupdated="4/8/2023 7:28:57 PM", Lifecycle Status=Active, Minimum Order=1, Number of Terminations=2, Package / Case="0603 (1608 Metric)", packaging=CutTape, Part Number=RC0603FR-7W10KL, Part Status=Active, partid=67088, price=0.01, series=RC_L, Size / Dimension="0.063\" L x 0.031\" W (1.60mm x 0.80mm)", Supplier 1=DigiKey
R6 R7 R21: library part RS73G1JTTD4701B, "RES 4.7K OHM 0.1% 1/5W 0603", Device Package="0603 (1608 Metric)", manufacturer="KOA Speer Electronics, Inc.", Operating Temperature="-55°C ~ 155°C", Power (Watts)="0.2W, 1/5W", Ratings=AEC-Q200, Supplier Device Package=0603, Supplier Part Number 1=2019-RS73G1JTTD4701BCT-ND, Temperature Coefficient=±50ppm/°C, Tolerance=±0.1%, componentlink1description=Datasheet, componentlink1url=http://www.koaspeer.com/pdfs/RS73.pdf, componentlink2description="DigiKey Link", componentlink2url=https://www.digikey.com/en/products/detail/koa-speer-electronics-inc/RS73G1JTTD4701B/11594383, Composition="Thick Film", Features="Automotive AEC-Q200, Moisture Resistant", Height - Seated (Max)="0.022\" (0.55mm)", lastupdated="4/17/2023 7:36:04 PM", Lifecycle Status=Active, Minimum Order=1, Number of Terminations=2, Package / Case="0603 (1608 Metric)", packaging=TapeAndReel, Part Number=RS73G1JTTD4701B, Part Status=Active, partid=56376, price=0.08, Resistance="4.7 kOhms", series=RS73, Size / Dimension="0.063\" L x 0.031\" W (1.60mm x 0.80mm)", Supplier 1=DigiKey
R8: library part RS73G1JTTD2201B, "RES 2.2K OHM 0.1% 1/5W 0603", Device Package="0603 (1608 Metric)", manufacturer="KOA Speer Electronics, Inc.", Operating Temperature="-55°C ~ 155°C", Power (Watts)="0.2W, 1/5W", Ratings=AEC-Q200, Supplier Device Package=0603, Supplier Part Number 1=2019-RS73G1JTTD2201BCT-ND, Temperature Coefficient=±50ppm/°C, Tolerance=±0.1%, componentlink1description=Datasheet, componentlink1url=https://www.koaspeer.com/pdfs/RS73.pdf, componentlink2description="DigiKey Link", componentlink2url=https://www.digikey.com/en/products/detail/koa-speer-electronics-inc/RS73G1JTTD2201B/11592705, Composition="Thick Film", Features="Automotive AEC-Q200, Moisture Resistant", Height - Seated (Max)="0.022\" (0.55mm)", lastupdated="4/17/2023 7:35:13 PM", Lifecycle Status=Active, Minimum Order=1, Number of Terminations=2, Package / Case="0603 (1608 Metric)", packaging=TapeAndReel, Part Number=RS73G1JTTD2201B, Part Status=Active, partid=70678, price=0.08, Resistance="2.2 kOhms", series=RS73, Size / Dimension="0.063\" L x 0.031\" W (1.60mm x 0.80mm)", Supplier 1=DigiKey

## Via types
v1: diameter 19.68, hole 11.81, Top Layer to Bottom Layer, 89 vias

## Nets (pads, with @x,y where several pads share a name; then routed paths per layer and width w, separated by ;. In a path a pad name is that pad's centre, name@x,y a point inside that pad or via, vN(x,y) a via of type N, cw(c..) or ccw(c..) an arc to the next point about the centre after c; other vN are vias at no path point)
BED: CN1.7 IC1.36 | length 841.3
  Top Layer w5: IC1.36 4701.54,3641.54 v1(4865,3805) ; v1(4890,3870) CN1.7
  Bottom Layer w5: v1(4865,3805) 4865,3845 v1(4890,3870)
BED_T: C11.2 CN13.1 IC1.16 R8.1 | length 791.4
  Top Layer w5: IC1.16 4760.59,2919.41 4935,2745 5090,2745 ; R8.1 5090,2745 ; C11.2 5160,2745 ; v1(5220,2745) 5160,2745 ; 5090,2745 5160,2745
  Bottom Layer w5: v1(5220,2745) 5270,2795 CN13.1
DIR1: CN1.10 IC1.20 | length 1140.3
  Top Layer w5: v1(4775,3115) 4777.71,3115 4790.38,3102.32 IC1.20 ; v1(5100,3930) 5100.47,3929.53 5199.53,3929.53 CN1.10
  Bottom Layer w5: v1(4775,3115) 4760,3130 4760,3193.29 5060,3493.29 5060,3905 5085,3930 v1(5100,3930)
DIR2: CN1.12 IC1.10 | length 1306.4
  Top Layer w5: IC1.10 4642.48,3047.48 v1(4643.74,3048.74) ; v1(5105,3970) 5106.25,3968.75 5199.67,3968.75 CN1.12
  Bottom Layer w5: v1(4643.74,3048.74) 4643.74,3105.31 5040,3501.57 5040,3929.14 5080.86,3970 v1(5105,3970)
DIR3: CN1.14 IC1.8 | length 1354.6
  Top Layer w5: IC1.8 4603.56,2965.44 4603.56,3056.56 v1(4604,3057) ; v1(5105,4006.5) 5105.65,4007.15 5199.35,4007.15 CN1.14
  Bottom Layer w5: v1(4604,3057) 4603.58,3057.42 4603.58,3093.44 5020,3509.86 5020,3937.43 5087.66,4005.08 5103.59,4005.08 v1(5105,4006.5)
DIR4: CN1.16 IC1.3 | length 1431.5
  Top Layer w5: IC1.3 4504.69,3035.71 v1(4520,3051) ; v1(5110,4047) 5110.08,4047.08 5199.92,4047.08 CN1.16
  Bottom Layer w5: v1(4520,3051) 5000,3531 5000,3951.84 5095.16,4047 v1(5110,4047)
DIR5: CN1.18 IC1.61 | length 1470.5
  Top Layer w5: IC1.61 4387.71,3101.66 4478.34,3101.66 v1(4479,3101) ; v1(5109,4087) 5109.23,4086.77 5199.77,4086.77 CN1.18
  Bottom Layer w5: v1(4479,3101) 4518.39,3101 4518.46,3101.08 4531.08,3101.08 4980,3550 4980,3974 5090.19,4084.19 5106.19,4084.19 v1(5109,4087)
E0: CN4.3 IC1.37 R20.1 | length 1123.4
  Top Layer w5: R20.1 4537.34,3803.81 4563.31,3777.84 4563.31,3766.69 v1(4565,3765) ; IC1.37 4681.93,3416.89 4681.93,3506.93 v1(4682,3507)
  Bottom Layer w5: CN4.3 4395,3885 4538.5,3741.5 4540,3740 4545,3735 ; v1(4565,3765) 4562.74,3762.74 4562.74,3752.74 4545,3735 ; v1(4682,3507) 4682,3598 4545,3735
E1: CN5.3 IC1.38 R19.1 | length 1235
  Top Layer w5: R19.1 4495,3705 v1(4515,3705) ; IC1.38 v1(4662.17,3532.83)
  Bottom Layer w5: CN5.3 4095,4165 4535.98,3724.02 ; v1(4515,3705) 4534.02,3724.02 4535.98,3724.02 ; v1(4662.17,3532.83) 4662.17,3597.83 4535.98,3724.02
ESP_RX: CN18.1 IC1.24 | length 619.9
  Top Layer w5: IC1.24 5156.06,3181.06 5215,3240 5215,3275 v1(5240,3300)
  Bottom Layer w5: v1(5240,3300) 5306.22,3366.22 5356.22,3366.22 CN18.1
ESP_TX: CN18.2 IC1.25 | length 676.6
  Top Layer w5: IC1.25 5145.75,3200.75 5195,3250 5195,3340 v1(5225,3370)
  Bottom Layer w5: v1(5225,3370) 5303.74,3448.74 CN18.2
FAN: CN1.2 IC1.27 | length 826.8
  Top Layer w5: IC1.27 5055.12,3240.12 5115,3300 5115,3719.14 5166.91,3771.05 5199.48,3771.05 CN1.2
FHE0: CN1.3 IC1.29 | length 771.6
  Top Layer w5: IC1.29 4994.49,3279.49 5105,3390 5105,3728.87 5167.39,3791.26 CN1.3
FHE1: CN1.4 IC1.30 | length 775.2
  Top Layer w5: IC1.30 4999.17,3299.17 5095,3395 5095,3740 5165.94,3810.94 CN1.4
GND: C1.2 C2.2 C3.1 C4.1 C5.1 C6.1 C7.1 C8.2 C9.2 C10.1 C11.1 C12.1 C13.1 C14.1 C15.1 C16.1 C19.1 CN1.8 CN1.19 CN1.26 CN1.MP1 CN1.MP2 CN2.3 CN3.3 CN4.2 CN5.2 CN6.2 CN7.1 CN7.4 CN9.3 CN11.2 CN12.2 CN13.2 CN15.6 CN15.9 CN15.10 CN15.S CN16.4 CN16.S CN17.MP1 CN17.MP2 IC1.12 IC1.18 IC1.31 IC1.47 IC1.63 IC2.2 IC3.2 J1.1 J2.1 J3.1 J4.1 J5.1 Q1.2 R16.1
GPU_MISO: CN17.2 IC1.22 | length 493.7
  Top Layer w5: IC1.22 5198.31,3141.69 5240.63,3099.37 CN17.2
GPU_MOSI: CN17.3 IC1.23 | length 485.5
  Top Layer w5: IC1.23 5208.62,3161.38 5231.26,3138.74 CN17.3
GPU_SCK: CN17.1 IC1.21 | length 501.8
  Top Layer w5: IC1.21 5192.99,3122.01 5255,3060 CN17.1
HE0: CN1.5 IC1.41 | length 868.6
  Top Layer w5: IC1.41 4603.11,3588.11 4845.63,3830.63 CN1.5
HE0_T: C10.2 CN12.1 IC1.14 R7.1 | length 1267.2
  Top Layer w5: IC1.14 4721.22,2918.78 4920,2720 4920,2375 5025,2270 5090,2270 ; R7.1 5090,2270 ; C10.2 5160,2270 ; v1(5205,2270) 5160,2270 ; 5090,2270 5160,2270
  Bottom Layer w5: v1(5205,2270) 5270,2335 CN12.1
HE1: CN1.6 IC1.43 | length 901.9
  Top Layer w5: IC1.43 4563.74,3563.74 4850.31,3850.32 CN1.6
HE1_T: C3.2 CN6.1 IC1.15 R6.1 | length 1011.8
  Top Layer w5: IC1.15 4740.91,2919.09 4930,2730 4930,2595 5020,2505 5090,2505 ; R6.1 5090,2505 ; C3.2 5160,2505 ; v1(5210,2505) 5160,2505 ; 5090,2505 5160,2505
  Bottom Layer w5: v1(5210,2505) 5270,2565 CN6.1
I2C_SCL: CN19.2 IC1.34 R18.2 | length 302
  Top Layer w5: IC1.34 4740.91,3493.91 v1(4799,3552)
  Bottom Layer w5: R18.2 4799,3602.56 v1(4799,3552) ; R18.2@4800.06,3601.5 4801.56,3603 CN19.2
I2C_SDA: CN19.1 IC1.35 R17.2 | length 411.1
  Top Layer w5: IC1.35 4721.22,3530.22 4771,3580 4771,3623 v1(4800,3652)
  Bottom Layer w5: v1(4800,3652) 4800,3702.12 R17.2 CN19.1
JTCK: CN9.5 IC1.49 | length 732
  Top Layer w5: v1(4240,3340) 4240.73,3339.27 4386.32,3339.27 IC1.49
  Bottom Layer w5: CN9.5@3760,3500 3760,3435 3855,3340 v1(4240,3340)
JTDO: CN9.4 IC1.55 | length 907.6
  Top Layer w5: v1(4105,3220) 4105.22,3220.22 4386.83,3220.22 IC1.55
  Bottom Layer w5: CN9.4@3660,3500 3660,3390 3830,3220 v1(4105,3220)
JTMS: CN9.6 IC1.46 | length 704.6
  Top Layer w5: v1(4491,3474) 4491,3473.31 4504.69,3459.62 IC1.46
  Bottom Layer w5: CN9.6@3860,3500 4172.83,3500 4198.83,3474 v1(4491,3474)
NetCN14_3: CN14.3 IC2.1 | length 606.7
  Top Layer w10: IC2.1 4125,2265 4350,2490 v1(4350,2575)
  Bottom Layer w10: v1(4350,2575) CN14.3
NetD1_1: D1.1 R1.2 | length 80
  Top Layer w5: R1.2 D1.1
NetD2_1: D2.1 R3.2 | length 85.9
  Top Layer w5: R3.2 4837.56,3942.56 4855,3960 D2.1
NetD3_1: D3.1 R14.1 | length 55
  Top Layer w5: R14.1 D3.1
NetD3_2: D3.2 Q1.3 | length 83.1
  Top Layer w5: Q1.3 D3.2
NetQ1_1: Q1.1 R15.1 R16.2 | length 141.8
  Top Layer w5: R15.1 R16.2 4037.56,4092.56 4052.4,4107.4 Q1.1
NRST: CN9.2 IC1.7 R5.2 | length 1492.4
  Top Layer w5: v1(4555,3025) 4570,3025 4583.43,3011.57 IC1.7 4583.43,2847.17 R5.2
  Bottom Layer w5: CN9.2@3460,3500 3935,3025 v1(4555,3025)
NZLF: CN1.1 IC1.26 | length 828.9
  Top Layer w5: IC1.26 5050.43,3220.43 5125,3295 5125,3715 5161.89,3751.89 5193.11,3751.89 5195,3750 5196.89,3751.89 CN1.1
SD0: CN15.7 IC1.39 R13.1 | length 826
  Top Layer w5: CN15.7 4012.35,3253.86 4118.49,3360 4140,3360 ; R13.1 4140,3312.44 4140,3360 ; IC1.39 4642.48,3377.48 4625,3360 4140,3360
SD1: CN15.8 IC1.40 R9.2 | length 782.1
  Top Layer w5: CN15.8 4007.17,3297.17 4080,3370 4207.44,3370 ; R9.2 4207.44,3370 ; IC1.40 4622.8,3377.8 4615,3370 4207.44,3370
SD2: CN15.1 IC1.51 R10.1 | length 718.3
  Top Layer w5: CN15.1 4055,2994.02 ; R10.1@4057.56,2950 R10.1 4055,2994.02 ; v1(4085,3050) 4085,3010 4069.02,2994.02 4055,2994.02 ; v1(4320,3300) 4320.41,3299.59 4386.63,3299.59 IC1.51
  Bottom Layer w5: v1(4085,3050) 4120,3085 4265,3085 4295,3115 4295,3275 v1(4320,3300)
SD3: CN15.2 IC1.52 R11.1 | length 737.4
  Top Layer w5: CN15.2 4002.32,3037.32 v1(4040,3075) 4095,3130 R11.1 ; v1(4040,3200) 4040,3220 4099.49,3279.49 IC1.52 IC1.52@4386.79,3279.74
  Bottom Layer w5: v1(4040,3075) v1(4040,3200)
SD_CLK: CN15.5 IC1.53 | length 485.9
  Top Layer w5: CN15.5 4033.05,3167.24 4060,3194.19 4060,3225.86 4093.95,3259.8 IC1.53
SD_CMD: CN15.3 IC1.54 R12.2 | length 591.4
  Top Layer w5: CN15.3 4005.63,3080.63 4080,3155 4080,3185 ; R12.2@4132.44,3185 4080,3185 ; IC1.54 4090.12,3240.12 4080,3230 4080,3185
SERVO: CN7.3 IC1.62 | length 963.8
  Top Layer w5: IC1.62 4432.36,3082.64 4445,3070 4445,2460 v1(4570,2335)
  Bottom Layer w5: v1(4570,2335) 4627.48,2277.52 CN7.3
STEP1: CN1.9 IC1.28 | length 955.8
  Top Layer w5: IC1.28 4838.96,3259.9 4914.9,3259.9 v1(4915,3260) ; v1(5125,3910) 5125.31,3909.68 5199.69,3909.68 CN1.9
  Bottom Layer w5: v1(4915,3260) 5010,3260 5075,3325 5075,3880 5105,3910 v1(5125,3910)
STEP2: CN1.11 IC1.17 | length 1247.1
  Top Layer w5: v1(4765,3050) 4768.97,3050 4775.71,3043.27 IC1.17 ; v1(5130,3950) 5130.63,3949.37 5199.37,3949.37 CN1.11
  Bottom Layer w5: v1(4765,3050) 4745,3070 4745,3192.43 5050,3497.43 5050,3925 5075,3950 v1(5130,3950)
STEP3: CN1.13 IC1.9 | length 1330.7
  Top Layer w5: IC1.9 v1(4622.8,3022.2) ; v1(5140,3987) 5140.56,3987.56 5199.44,3987.56 CN1.13
  Bottom Layer w5: v1(4622.8,3022.2) 4622.8,3098.51 5030,3505.72 5030,3933.28 5084.96,3988.25 5138.75,3988.25 v1(5140,3987)
STEP4: CN1.15 IC1.4 | length 1404
  Top Layer w5: IC1.4 4524.37,3029.56 4556.81,3062 v1(4558,3062) ; v1(5141,4026) 5141.74,4026.74 5199.26,4026.74 CN1.15
  Bottom Layer w5: v1(4558,3062) 5010,3514 5010,3941.57 5094.43,4026 v1(5141,4026)
STEP5: CN1.17 IC1.2 | length 1459.7
  Top Layer w5: IC1.2 4485,3041.81 v1(4526.02,3082.83) ; v1(5141,4067) 5141.07,4066.93 5199.93,4066.93 CN1.17
  Bottom Layer w5: v1(4526.02,3082.83) 4526.97,3082.83 4990,3545.86 4990,3961 5096,4067 v1(5141,4067)
TMC_DIAG: CN1.25 IC1.56 | length 1520.1
  Top Layer w5: IC1.56 4387.1,3200.7 4453.19,3200.7 v1(4453.24,3200.64) ; v1(5122,4224) 5122.33,4224.33 CN1.25
  Bottom Layer w5: v1(4453.24,3200.64) 4559.93,3200.64 4930,3570.71 4930,4054 5100,4224 v1(5122,4224)
TMC_ENN: CN1.24 IC1.57 | length 1513.7
  Top Layer w5: IC1.57@4387.08,3181.03 v1(4480,3181) ; v1(5150,4205) 5150.18,4204.82 5199.82,4204.82 CN1.24
  Bottom Layer w5: v1(4480,3181) 4554.43,3181 4940,3566.57 4940,4038.53 5106.47,4205 v1(5150,4205)
TMC_S1: CN1.23 IC1.58 | length 1513.7
  Top Layer w5: IC1.58 4387.24,3161.19 4451.81,3161.19 v1(4452,3161) ; v1(5117,4185) CN1.23
  Bottom Layer w5: v1(4452,3161) 4548.57,3161 4950,3562.43 4950,4034.39 5100.61,4185 v1(5117,4185)
TMC_S2: CN1.22 IC1.59 | length 1513.9
  Top Layer w5: IC1.59 4387.39,3141.35 4484.65,3141.35 v1(4485,3141) ; v1(5148,4165) 5148.14,4165.14 5199.86,4165.14 CN1.22
  Bottom Layer w5: v1(4485,3141) 4542.72,3141 4960,3558.28 4960,4030 5095.14,4165.14 5147.86,4165.14 v1(5148,4165)
TMC_S3: CN1.21 IC1.60 | length 1513.3
  Top Layer w5: IC1.60@4387.05,3122 v1(4453,3122) ; v1(5111,4145) 5111.3,4145.3 5199.7,4145.3 CN1.21
  Bottom Layer w5: v1(4453,3122) 4537.86,3122 4970,3554.14 4970,4025.86 5089.14,4145 v1(5111,4145)
TMC_UART: CN1.20 IC1.42 | length 1025.5
  Top Layer w5: IC1.42 4584.14,3417.53 4584.14,3549.28 v1(4584.86,3550) ; v1(4585,3615) 5095.91,4125.91 CN1.20
  Bottom Layer w5: v1(4584.86,3550) 4584.93,3550.07 4584.93,3614.93 v1(4585,3615)
USB_N: CN16.2 IC1.44 IC3.1 IC3.6 | length 1203
  Top Layer w5: v1(4070,3840) 4105,3805 4105,3800 4106.25,3801.25 IC3.1 ; IC3.6 4178.35,3731.65 v1(4215,3695) ; v1(4516.05,3517.12) 4544.06,3489.11 IC1.44
  Bottom Layer w5: CN16.2 3835.31,3989.41 3869.73,3989.41 4032.18,3826.96 ; v1(4070,3840) 4045.22,3840 4032.18,3826.96 ; v1(4215,3695) 4215,3694.73 4225,3684.73 4225,3665 4209.57,3649.57 ; v1@4515.84,3517.12 4342.02,3517.12 4209.57,3649.57 ; 4032.18,3826.96 4209.57,3649.57
USB_P: CN16.3 IC1.45 IC3.3 IC3.4 | length 1134.4
  Top Layer w5: v1(4015,3785) 4051.65,3748.35 IC3.3 ; IC3.4 4160,3642.11 v1(4160,3640) ; v1@4520.57,3486.21 4520.57,3482.24 4524.37,3478.44 IC1.45
  Bottom Layer w5: CN16.3 3929.6,3914.29 4024.44,3819.44 ; v1(4015,3785) 4015,3810 4024.44,3819.44 ; v1(4160,3640) 4163.97,3640 4173.97,3630 4190,3630 4201.94,3641.94 ; v1@4520.57,3486.21 4520.36,3486.21 4499.57,3507 4336.89,3507 4201.94,3641.94 ; 4024.44,3819.44 4201.94,3641.94
  other v1: 4522.57,3481.21
VBAT: CN14.2 IC1.1 | length 384.2
  Top Layer w10: CN14.2 v1(4410,2830) ; v1(4465,2905) 4465.16,2905.16 4465.16,2964.84 IC1.1
  Bottom Layer w10: v1(4410,2830) 4463.15,2883.15 4463.15,2903.15 v1(4465,2905)
VBUS: C19.2 CN16.1 IC3.5 R15.2 | length 647.6
  Top Layer w5: R15.2 v1(3955,3995) 4155,3795 4160,3795 ; IC3.5 4120,3735 4120,3755 4160,3795 ; C19.2 4160,3795
  Bottom Layer w5: CN16.1 3928.15,3995 v1(3955,3995)
VDD: C8.1 C9.1 C12.2 C13.2 C14.2 C15.2 C16.2 CN2.1 CN3.1 CN4.1 CN5.1 CN7.2 CN9.1 CN11.1 CN14.1 CN15.4 IC1.19 IC1.32 IC1.48 IC1.64 L1.2 R1.1 R2.1 R3.1 R4.1 R5.1 R6.2 R7.2 R8.2 R9.1 R10.2 R11.2 R12.1 R13.2 R14.2 R17.1 R18.1 R19.2 R20.2 R21.2 | length 12367.9
  Top Layer w8: R11.2 v1(4270,3130) ; R12.1 v1(4270,3185) ; R13.2 v1(4270,3310) ; v1(4225.28,4525.62) 4225.28,4252.74 4369,4109.02 4369,3920 ; R14.2 4252.44,3980.56 4313,3920 4369,3920 ; R9.1 4264.56,3417 v1(4395,3417) 4465.13,3417 IC1.48 ; R19.2 4400,3800 4369,3800 ; IC1.48@4465,3417.13 C14.2 4464.74,3544.74 4405.26,3544.74 4369,3581 4369,3800 ; R2.1 4436.88,4014.88 4425,4003 4425,3920 ; R1.1@4484.88,3920 4454.94,3920 ; R20.2@4490,3840 R20.2 4454.94,3885.06 4454.94,3920 ; IC1.19 4845.42,3082.64 4846.33,3083.55 4847.23,3082.64 C12.2@4952.36,3082.64 ; v1@4952.36,2848.64 C12.2@4952.36,3082.64 ; C12.2 C12.2@4952.36,3082.64 ; 4369,3800 4369,3920 ; 4369,3920 4425,3920 ; 4425,3920 4454.94,3920
  Top Layer w10: v1(3790,3125) 3790.53,3124.47 3957.54,3124.47 CN15.4 ; v1(4055,2762) R10.2 ; v1(4270,2765) C16.2 C15.2 4273.27,3043.27 IC1.64 ; R21.2@4530,2585 4523,2592 v1(4523,2761) 4583,2761 4585,2759 ; R5.1 4585,2759 ; v1(4744,3969) 4745.56,3967.44 4778,3967.44 ; v1(4750,2200) 4830,2200 ; R4.1 4778,4010.44 4778,3967.44 ; R3.1 4778,3924.44 4778,3967.44 ; v1(4798,3510) 4838.86,3469.14 IC1.32 4875.54,3338.54 4900.43,3363.43 C13.2 ; C9.1 4830,2200 ; v1(4953,2848) 4955,2850 4955,2848.65 4957.47,2846.18 R8.2 ; v1(5019,2386) 5019.41,2385.59 R7.2 ; v1(5019.39,2614.9) 5019.49,2615 R6.2 ; v1(5176.76,2126.76) 5118.87,2184.65 C8.1 4950.35,2184.65 4895,2240 ; 4585,2759 4585,2720 4709.45,2595.55 L1.2 4855,2280 4895,2240 ; 4830,2200 4855,2200 4895,2240
  Bottom Layer w8: v1(4270,3130) v1(4270,3185) ; v1@4270,3185.85 v1(4270,3310) 4270,3356 4331,3417 v1(4395,3417) ; R18.1 R18.1@4744,3603.56
  Bottom Layer w10: CN14.1 4150,2762 ; v1(4270,2765) v1@4267,2762 ; v1(4523,2761) 4522,2762 v1@4267,2762 ; CN7.2 4660.61,2199.39 4749.39,2199.39 v1(4750,2200) ; R18.1 4743.44,3564.56 v1(4798,3510) ; R18.1@4744,3603.56 R17.1 v1(4744,3969) 4744,4201 4817,4274 4817,4521 ; v1(4856,2386) 4952,2386 ; v1(4953,2848) 4952,2847 4952,2614.9 ; CN3.1 CN2.1 4689.21,4527.64 4395.79,4527.64 CN4.1 4394.21,4527.64 4225.28,4527.64 4095.79,4527.64 CN5.1 3516.85,4526.85 3360,4370 3360,3500 3360,3379 3614,3125 v1(3790,3125) 3790,2860 3888,2762 v1(4055,2762) 4150,2762 ; v1(5019,2386) 4952,2386 ; v1(5019.39,2614.9) 4952,2614.9 ; v1(5176.76,2126.76) 5179.38,2126.76 5191.14,2115 CN11.1 CN11.1@5367.76,2137.76 ; 4150,2762 v1@4267,2762 ; 4952,2386 4952,2614.9
VDDA: C4.2 C5.2 C6.2 C7.2 IC1.13 L1.1 | length 523.3
  Top Layer w8: C5.2 4655,2875 4688.46,2908.46 4701.54,2908.46 ; IC1.13 4701.54,2908.46 ; C7.2 4775,2828 4753,2850 C4.2 4715,2875 4701.54,2888.46 4701.54,2908.46
  Top Layer w10: C7.2 C6.2 4775.55,2664.45 L1.1